# EAGLE board ultrasonico (EAGLE 6.5.0)
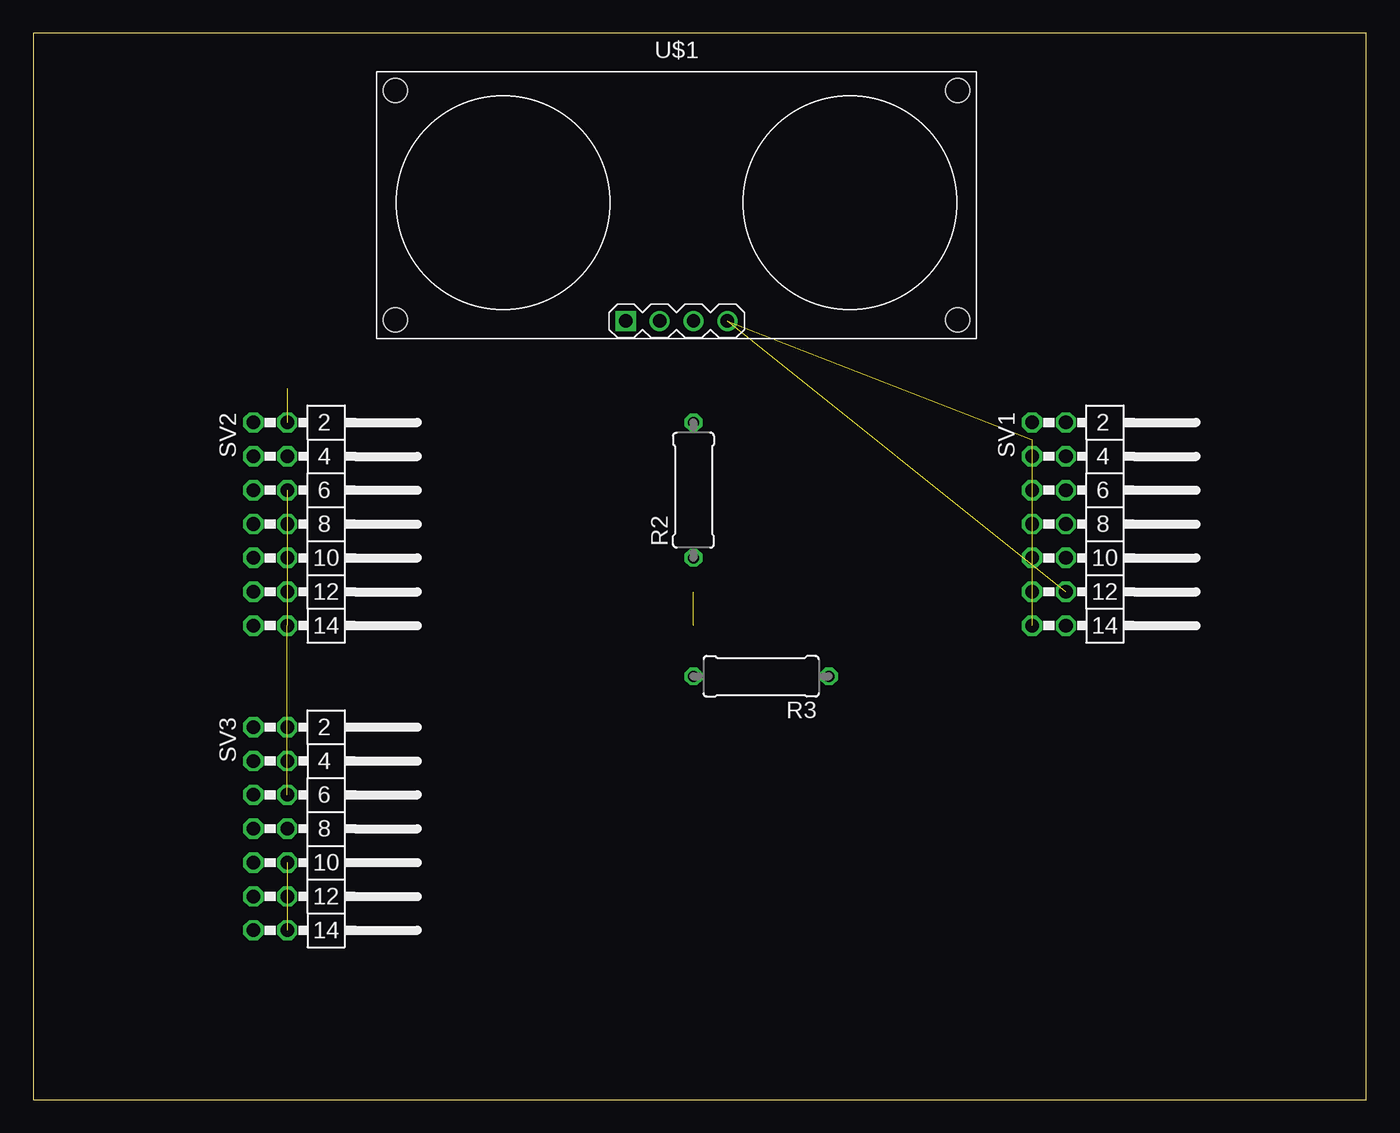
[diagram p0: board, top side]
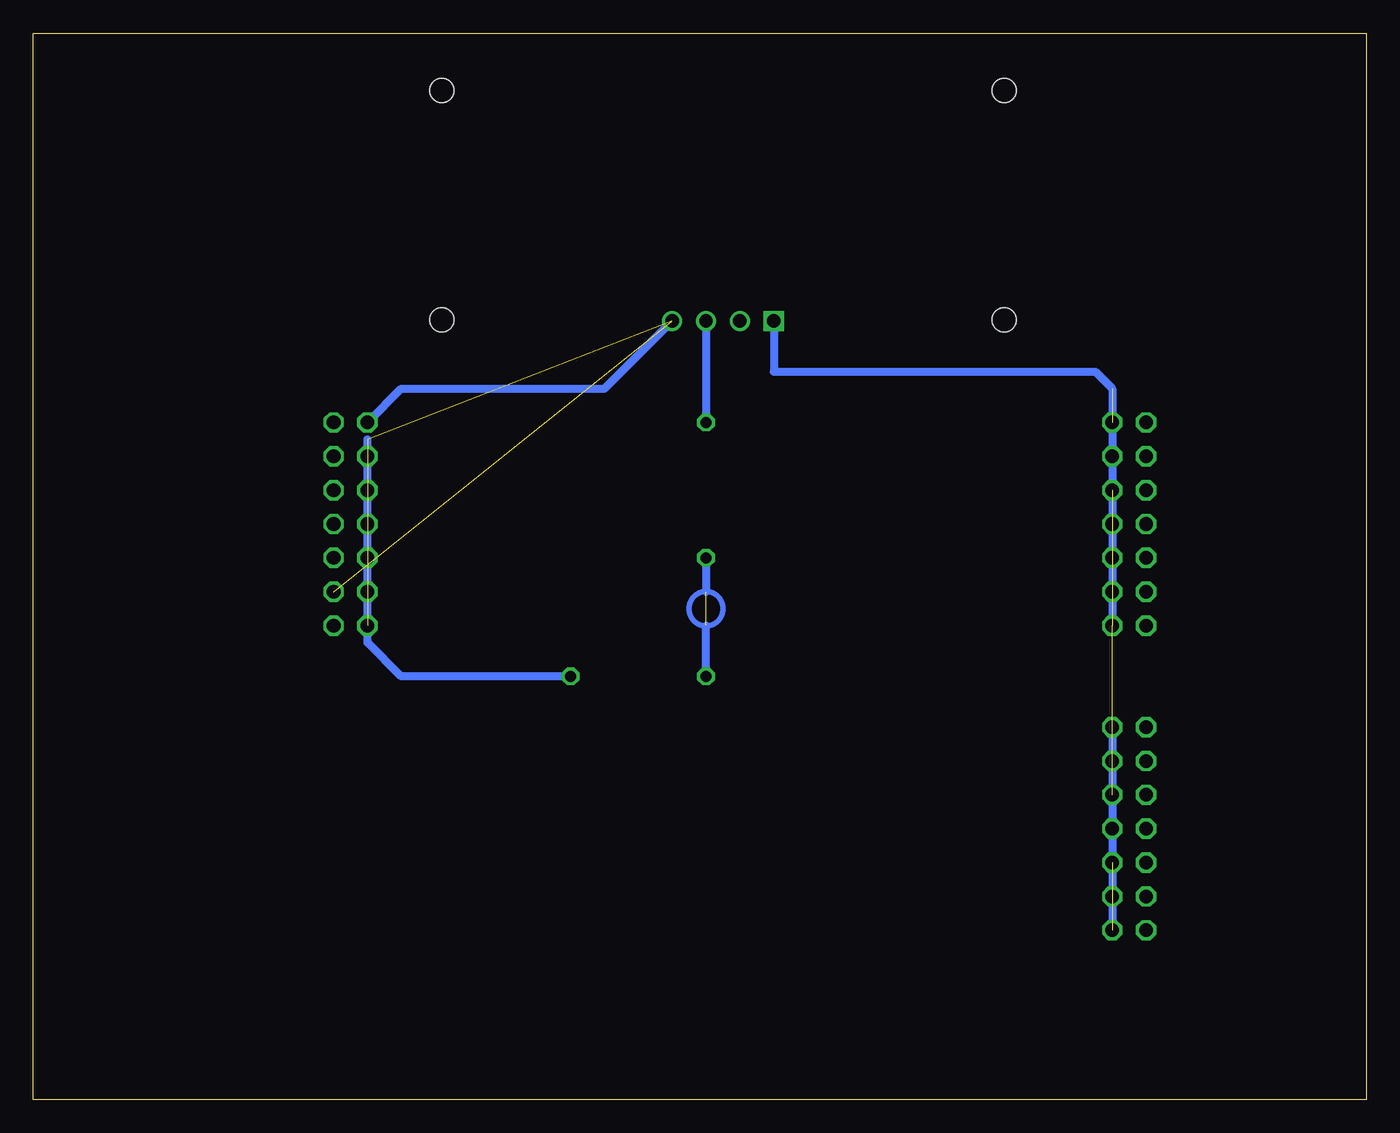
[diagram p1: board, bottom side, seen from below]

Size 100 x 80 mm. Coordinates in mm from the lower left corner, seen from the top.
Outline: 0,0 100,0 100,80 0,80 0,0
Copper layers (1*16): Top 0.035mm / dielectric 1.5mm / Bottom 0.035mm
Design rules "default": minimum track width 10mil, minimum drill 24mil, track to track 8mil, track to pad 8mil, pad to pad 8mil, via to via 8mil, smd to smd 8mil, copper to edge 40mil, drill to drill 8mil, minimum pad ring 10mil, minimum via ring 8mil, stop-mask expansion 4mil, vias tented up to drill 0mil, thermal gap 10mil

## Footprints (pad centres in the part's own frame; a part is rotated, then mirrored left to right if it is on the bottom)
0309/10 = drill 0.813 octagon: 1 -5.08,0; 2 5.08,0
MA07-2W = drill 1.016 octagon: 1 -7.62,-1.27; 2 -7.62,1.27; 3 -5.08,-1.27; 4 -5.08,1.27; 5 -2.54,-1.27; 6 -2.54,1.27; 7 0,-1.27; 8 0,1.27; 9 2.54,-1.27; 10 2.54,1.27; 11 5.08,-1.27; 12 5.08,1.27; 13 7.62,-1.27; 14 7.62,1.27
ULTRASONIC-HC-SR04 = drill 1 square: 1 -3.81,-8.89 | drill 1: 2 -1.27,-8.89; 3 1.27,-8.89; 4 3.81,-8.89 | hole 1.8: -21.1,8.4; -21.1,-8.8; 21.1,-8.8; 21.1,8.4

## Placement (x,y rotation side)
R2  [0309/10]  49.53,45.72 90 top
R3  [0309/10]  54.61,31.75 180 top
SV1  [MA07-2W]  76.2,43.18 270 top
SV2  [MA07-2W]  17.78,43.18 270 top
SV3  [MA07-2W]  17.78,20.32 270 top
U$1  ULTRASONIC-HC-SR04  [ULTRASONIC-HC-SR04]  48.26,67.31 0 top

## Library data of the parts
R2 R3 = resistor
SV1-SV3 = con-lstb; OC_FARNELL: unknown; OC_NEWARK: unknown
U$1 = diy-modules

## Nets
GND: R3.1 SV1.1 SV1.3 SV1.5 SV1.7 SV1.9 SV1.11 SV1.13
N$2: R2.2 U$1.3
N$4: R2.1 R3.2
N$5: SV1.12 U$1.4
VCC: SV2.2 SV2.6 SV2.8 SV2.10 SV2.12 SV2.14 SV3.2 SV3.4 SV3.6 SV3.10 SV3.12 SV3.14 U$1.1

## Tracks (layer width: path | path; a pad name or v marks a point on that pad's centre or on a via)
GND  (7 unrouted)
  Bottom 0.61: R3.1 72.39,31.75 74.93,34.29 74.93,49.53 | SV1.1 72.39,53.34 57.15,53.34 52.07,58.42
N$2
  Bottom 0.61: U$1.3 R2.2
N$4  (1 unrouted)
  Bottom 0.61: R2.1 49.53,38.1 | R3.2 49.53,35.56
N$5  (1 unrouted)
VCC  (10 unrouted)
  Bottom 0.61: U$1.1 44.45,54.61 20.32,54.61 19.05,53.34 SV2.14 | SV3.2 SV3.14
(copper drawn outside any net)
  shapes: Bottom circle x1